# EAGLE board UDAWA Gadadar (EAGLE 9.7.0)
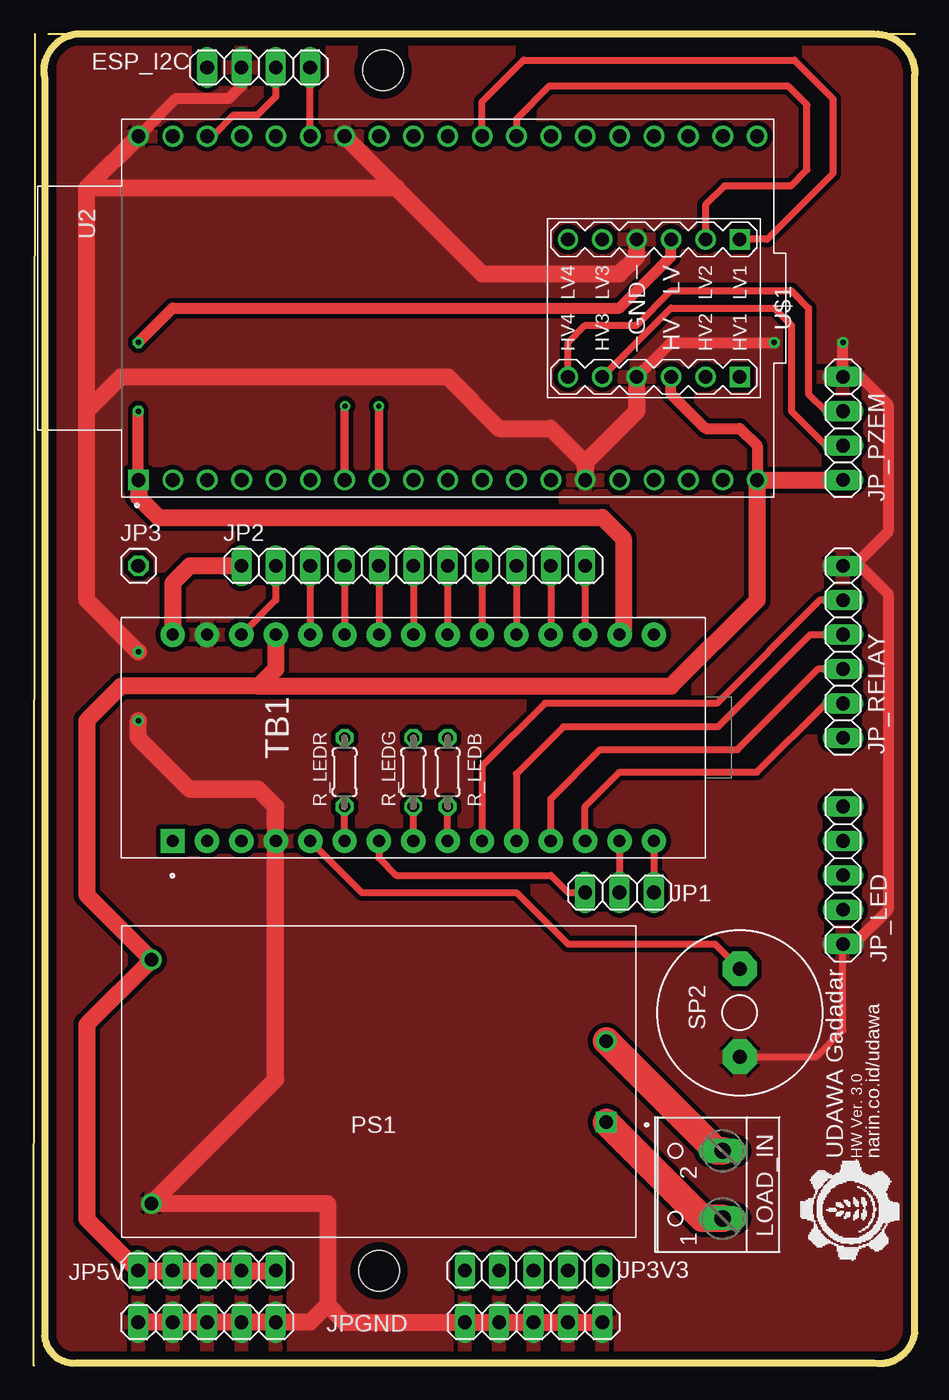
[diagram p0: board, top side]
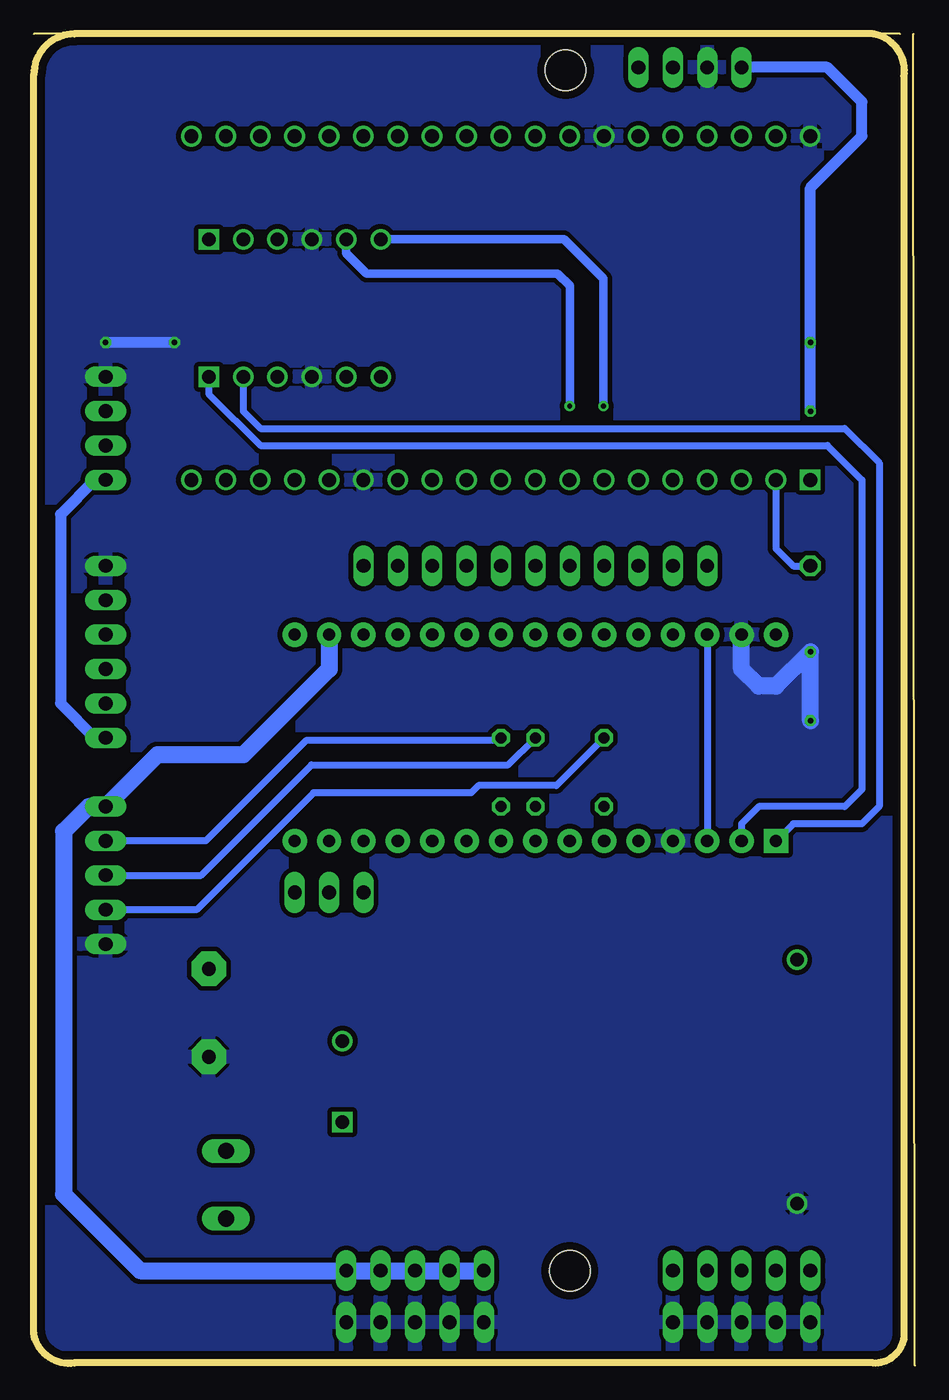
[diagram p1: board, bottom side, seen from below]

Size 64.34 x 98.23 mm. Coordinates in mm from the lower left corner, seen from the top.
Outline: 0.04,95.03 0.04,2.03 arc90 2.34,0.03 61.34,0.03 arc90 64.34,2.23 64.34,95.23 arc90 61.34,98.23 2.34,98.23 arc90 0.04,95.03
Copper layers (1*16): Top 0.035mm / dielectric 1.5mm / Bottom 0.035mm
Design rules "default *": minimum track width 6mil, minimum drill 0.35mm, track to track 0.35mm, track to pad 0.35mm, pad to pad 0.35mm, via to via 0.35mm, smd to smd 0.15mm, copper to edge 0.6mm, drill to drill 0.3mm, minimum pad ring 10mil, minimum via ring 8mil, stop-mask expansion 4mil, vias tented up to drill 0mil, thermal gap 10mil
Holes 3 mm at 24.74,6.85 25.04,95.53

## Footprints (pad centres in the part's own frame; a part is rotated, then mirrored left to right if it is on the bottom)
1X04 = drill 1.016 long: 1 -3.81,0; 2 -1.27,0; 3 1.27,0; 4 3.81,0
1X03 = drill 1.016 long: 1 -2.54,0; 2 0,0; 3 2.54,0
1X11 = drill 1.016 long: 1 -12.7,0; 2 -10.16,0; 3 -7.62,0; 4 -5.08,0; 5 -2.54,0; 6 0,0; 7 2.54,0; 8 5.08,0; 9 7.62,0; 10 10.16,0; 11 12.7,0
1X01 = drill 1.016 octagon: 1 0,0
1X05 = drill 1.016 long: 1 -5.08,0; 2 -2.54,0; 3 0,0; 4 2.54,0; 5 5.08,0
1X06 = drill 1.016 long: 1 -6.35,0; 2 -3.81,0; 3 -1.27,0; 4 1.27,0; 5 3.81,0; 6 6.35,0
W237-102 = drill 1.194 long: 1 -2.5,-1.27; 2 2.5,-1.27
CONV_HLK-5M05 = drill 1 pad 1.5 square: 1 -16.8,3 | drill 1 pad 1.5: 2 -16.8,-3; 3 16.8,9; 4 16.8,-9
0204/5 = drill 0.813 octagon: 1 -2.54,0; 2 2.54,0
AL60P = drill 1.016 pad 2.54 octagon: 1 -3.251,0; 2 3.251,0
SHIELD_ARDUINO_NANO = drill 0.9 pad 1.8 square: 1 -7.62,17.78 | drill 0.9 pad 1.8: 2 -7.62,15.24; 3 -7.62,12.7; 4 -7.62,10.16; 5 -7.62,7.62; 6 -7.62,5.08; 7 -7.62,2.54; 8 -7.62,0; 9 -7.62,-2.54; 10 -7.62,-5.08; 11 -7.62,-7.62; 12 -7.62,-10.16; 13 -7.62,-12.7; 14 -7.62,-15.24; 15 -7.62,-17.78; 16 7.62,-17.78; 17 7.62,-15.24; 18 7.62,-12.7; 19 7.62,-10.16; 20 7.62,-7.62; 21 7.62,-5.08; 22 7.62,-2.54; 23 7.62,0; 24 7.62,2.54; 25 7.62,5.08; 26 7.62,7.62; 27 7.62,10.16; 28 7.62,12.7; 29 7.62,15.24; 30 7.62,17.78
MODULE_ESP32-DEVKITC-32U = drill 1.02 square: 1 -12.7,22.85 | drill 1.02: 2 -12.7,20.31; 3 -12.7,17.77; 4 -12.7,15.23; 5 -12.7,12.69; 6 -12.7,10.15; 7 -12.7,7.61; 8 -12.7,5.07; 9 -12.7,2.53; 10 -12.7,-0.01; 11 -12.7,-2.55; 12 -12.7,-5.09; 13 -12.7,-7.63; 14 -12.7,-10.17; 15 -12.7,-12.71; 16 -12.7,-15.25; 17 -12.7,-17.79; 18 -12.7,-20.33; 19 -12.7,-22.87; 20 12.7,-22.87; 21 12.7,-20.33; 22 12.7,-17.79; 23 12.7,-15.25; 24 12.7,-12.71; 25 12.7,-10.17; 26 12.7,-7.63; 27 12.7,-5.09; 28 12.7,-2.55; 29 12.7,-0.01; 30 12.7,2.53; 31 12.7,5.07; 32 12.7,7.61; 33 12.7,10.15; 34 12.7,12.69; 35 12.7,15.23; 36 12.7,17.77; 37 12.7,20.31; 38 12.7,22.85
LEVEL-SHIFTER-4CH = drill 1 square: J1.1 -5.08,6.35; J2.1 5.08,6.35 | drill 1: J1.2 -5.08,3.81; J1.3 -5.08,1.27; J1.4 -5.08,-1.27; J1.5 -5.08,-3.81; J1.6 -5.08,-6.35; J2.2 5.08,3.81; J2.3 5.08,1.27; J2.4 5.08,-1.27; J2.5 5.08,-3.81; J2.6 5.08,-6.35

## Placement (x,y rotation side)
ESP_I2C  [1X04]  15.85,95.75 0 top
JP1  [1X03]  42.52,34.79 0 top
JP2  [1X11]  27.28,58.92 0 top
JP3  PINHD-1X1  [1X01]  6.96,58.92 0 top
JP3V3  [1X05]  36.17,6.85 180 top
JP5V  [1X05]  12.04,6.85 0 top
JP_LED  [1X05]  59.03,36.06 90 top
JP_PZEM  [1X04]  59.03,69.08 270 top
JP_RELAY  [1X06]  59.03,52.57 270 top
JPGND  [1X05]  36.17,3.04 0 top
JPGND1  [1X05]  12.04,3.04 0 top
LOAD_IN  [W237-102]  48.87,13.2 90 top
PS1  HLK-5M05  [CONV_HLK-5M05]  24.74,20.82 180 top
R_LEDB  1K  [0204/5]  29.82,43.68 90 top
R_LEDG  1K  [0204/5]  27.28,43.68 90 top
R_LEDR  1K  [0204/5]  22.2,43.68 90 top
SP2  AL60P  [AL60P]  51.41,25.9 90 top
TB1  ARDUINO_NANO  [SHIELD_ARDUINO_NANO]  27.28,46.22 90 top
U2  ESP32-DEVKITC-32U  [MODULE_ESP32-DEVKITC-32U]  29.82,77.97 90 top
U$1  LEVEL-SHIFTER-4CH  [LEVEL-SHIFTER-4CH]  45.06,77.97 270 top

## Library data of the parts
ESP_I2C JP1 JP2 JP3V3 JP5V JP_LED JP_PZEM JP_RELAY JPGND JPGND1 = pinhead
JP3 = Connector; CATEGORY: CONNECTOR; SUB-CATEGORY: PIN-HEADER
LOAD_IN = con-wago-500; MPN: 237-102; OC_FARNELL: unknown; OC_NEWARK: 70K9898
PS1 = HLK-5M05; AVAILABILITY: Not in stock; MF: Hi-link; MP: HLK-5M05; PACKAGE: Package; PRICE: None
R_LEDB R_LEDG R_LEDR = rcl; SPICEPREFIX: R
SP2 = buzzer; OC_FARNELL: unknown; OC_NEWARK: unknown
TB1 = ARDUINO_NANO; AVAILABILITY: Not in stock; DESCRIPTION: Small, complete, and breadboard-friendly board based on the ATmega328 (Arduino Nano 3.x); MF: Arduino; MP: Arduino Nano; PACKAGE: Non-Standard Arduino; PRICE: None
U2 = ESP32-DEVKITC-32U; AVAILABILITY: In Stock; DESCRIPTION: ESP32-WROOM-32UE series Transceiver; 802.11 b/g/n (Wi-Fi, WiFi, WLAN), Bluetooth® Smart Ready 4.x Dual Mode Evaluation Board; MF: Espressif Systems; MP: ESP32-DEVKITC-32U; PACKAGE: None; PRICE: None; PURCHASE-URL: https://pricing.snapeda.com/search/part/ESP32-DEVKITC-32U/?ref=eda
U$1 = diy-modules

## Nets
3V3: ESP_I2C.1 JP3V3.1 JP3V3.2 JP3V3.3 JP3V3.4 JP3V3.5 JP_LED.5 TB1.17 U2.1 U$1.J1.3
5V: JP5V.1 JP5V.2 JP5V.3 JP5V.4 JP5V.5 JP_PZEM.4 JP_RELAY.6 PS1.4 TB1.27 U2.19 U$1.J2.3
AC1: LOAD_IN.1 PS1.1
AC2: LOAD_IN.2 PS1.2
CA0: JP2.10 TB1.19
CA1: JP2.9 TB1.20
CA2: JP2.8 TB1.21
CA3: JP2.7 TB1.22
CA6: JP2.4 TB1.25
CA7: JP2.3 TB1.26
CAREF: JP2.11 TB1.18
CD4: JP1.1 TB1.7
CD11: JP1.2 TB1.14
CD12: JP1.3 TB1.15
CD13: TB1.16
CH1: JP_RELAY.2 TB1.10
CH2: JP_RELAY.3 TB1.11
CH3: JP_RELAY.4 TB1.12
CH4: JP_RELAY.5 TB1.13
COMCU_RX: TB1.2 U$1.J2.1
COMCU_SCL: JP2.5 TB1.24
COMCU_SDA: JP2.6 TB1.23
COMCU_TX: TB1.1 U$1.J2.2
CRST: JP2.2 TB1.3 TB1.28
CVIN: JP2.1 TB1.30
ESP_SCL: ESP_I2C.3 U2.36
ESP_SDA: ESP_I2C.4 U2.33
GND: ESP_I2C.2 JP_LED.1 JP_PZEM.1 JP_RELAY.1 JPGND1.1 JPGND1.2 JPGND1.3 JPGND1.4 JPGND1.5 JPGND.1 JPGND.2 JPGND.3 JPGND.4 JPGND.5 PS1.3 SP2.1 TB1.4 TB1.29 U2.14 U2.32 U2.38 U$1.J1.4 U$1.J2.4
MEN: JP3.1 U2.2
PIN_BUZZER: SP2.2 TB1.5
PIN_LEDB: R_LEDB.1 TB1.9
PIN_LEDG: R_LEDG.1 TB1.8
PIN_LEDR: R_LEDR.1 TB1.6
PZEM_RX: JP_PZEM.3 U$1.J2.5
PZEM_TX: JP_PZEM.2 U$1.J2.6
RLEDB: JP_LED.4 R_LEDB.2
RLEDG: JP_LED.3 R_LEDG.2
RLEDR: JP_LED.2 R_LEDR.2
S0_RX: U2.34
S0_TX: U2.35
S1_RX: U2.7 U$1.J1.6
S1_TX: U2.8 U$1.J1.5
S2_RX: U2.27 U$1.J1.2
S2_TX: U2.28 U$1.J1.1

## Tracks (layer width: path | path; a pad name or v marks a point on that pad's centre or on a via)
3V3  (via drill 0.41)
  Top 0.813: v6.96,75.43 9.5,77.97 42.52,77.97 46.33,81.78 U$1.J1.3 | U2.1 v6.96,70.35
  Top 1.27: U2.1 6.97,64.01 6.96,64 8.46,62.5 41.25,62.5 42.79,60.95 42.79,54.12 TB1.17
  Bottom 0.813: v6.96,70.35 v6.96,75.43 6.96,86.86 3.15,90.67 3.15,93.21 5.69,95.75 ESP_I2C.1
  Bottom 1.27: TB1.17 42.52,51.3 48.87,44.95 55.22,44.95 JP_LED.5 60.3,41.14 62.13,39.3 62.13,12.5 56.49,6.85 JP3V3.1 JP3V3.2 JP3V3.3 JP3V3.4 JP3V3.5
5V
  Top 0.813: U$1.J2.3 46.33,71.62 48.87,69.08 51.41,69.08 52.69,67.8 U2.19
  Top 1.27: TB1.27 17.12,51.3 15.85,50.03 | 15.85,50.03 5.69,50.03 3.15,47.49 3.15,34.61 PS1.4 3.15,25.03 3.15,10.66 JP5V.1 JP5V.2 JP5V.3 JP5V.4 JP5V.5 | 15.85,50.03 46.33,50.03 52.69,56.39 U2.19 JP_PZEM.4
  Bottom 0.813: JP_PZEM.4 59.82,65.27 62.36,62.73 62.36,48.76 59.82,46.22 JP_RELAY.6
AC1
  Top 2.032: PS1.1 48.66,10.7 LOAD_IN.1
AC2
  Top 2.032: PS1.2 49.66,15.7 LOAD_IN.2
CA0
  Top 0.508: JP2.10 TB1.19
CA1
  Top 0.508: JP2.9 TB1.20
CA2
  Top 0.508: JP2.8 TB1.21
CA3
  Top 0.508: JP2.7 TB1.22
CA6
  Top 0.508: JP2.4 TB1.25
CA7
  Top 0.508: JP2.3 TB1.26
CAREF
  Top 0.508: JP2.11 TB1.18
CD4
  Top 0.508: TB1.7 24.74,37.33 26.01,36.06 37.44,36.06 38.71,34.79 JP1.1
CD11
  Top 0.508: TB1.14 JP1.2
CD12
  Top 0.508: TB1.15 JP1.3
CH1
  Top 0.508: TB1.10 32.36,44.12 36.99,48.76 49.69,48.76 57.31,56.38 JP_RELAY.2
CH2
  Top 0.508: TB1.11 34.9,43.55 38.37,47.03 49.8,47.03 56.61,53.84 JP_RELAY.3
CH3
  Top 0.508: TB1.12 37.44,41.71 41.08,45.35 51.24,45.35 57.18,51.3 JP_RELAY.4
CH4
  Top 0.508: JP_RELAY.5 57.76,48.76 52.68,43.68 42.52,43.68 39.98,41.14 TB1.13
COMCU_RX
  Bottom 0.508: U$1.J2.1 51.41,71.62 47.6,67.81 5.69,67.81 3.15,65.27 3.15,42.41 4.42,41.14 10.77,41.14 12.04,39.87 TB1.2
COMCU_SCL
  Top 0.508: JP2.5 TB1.24
COMCU_SDA
  Top 0.508: JP2.6 TB1.23
COMCU_TX
  Bottom 0.508: U$1.J2.2 48.87,70.35 47.6,69.08 4.42,69.08 1.88,66.54 1.88,41.14 3.15,39.87 8.23,39.87 TB1.1
CRST
  Top 0.508: JP2.2 17.12,56.38 TB1.28
  Bottom 0.508: TB1.28 TB1.3
CVIN
  Top 1.27: JP2.1 10.77,58.92 9.5,57.65 TB1.30
ESP_SCL
  Top 0.508: U2.36 12.44,90.67 13.98,92.21 15.75,92.21 17.12,93.58 ESP_I2C.3
ESP_SDA
  Top 0.254: U2.33
  Top 0.508: U2.33 ESP_I2C.4
GND  (via drill 0.41)
  Top 0.508: SP2.1 57.04,22.65 59.03,24.63 JP_LED.1
  Top 0.813: U$1.J2.4 46.33,75.43 v53.95,75.43 | v59.03,75.43 JP_PZEM.1 60.3,72.89 62.36,70.82 62.36,61.46 59.82,58.92 JP_RELAY.1 60.3,58.92 62.36,56.85 62.36,33.52 59.82,30.98 JP_LED.1 | U2.38 9.76,93.47 13.66,93.47 14.55,94.36 14.55,95.73 ESP_I2C.2
  Top 1.27: v6.96,47.49 6.96,46.22 10.77,42.41 15.85,42.41 17.12,41.14 TB1.4 17.12,21 PS1.3 20.93,11.82 20.93,4.31 | 3.15,70.35 3.15,56.38 v6.96,52.57 | 3.15,70.35 5.69,72.89 29.82,72.89 33.63,69.08 37.44,69.08 39.99,66.53 U2.14 39.99,66.55 43.79,70.35 U$1.J2.4 | U$1.J1.4 43.79,81.78 42.52,80.51 32.37,80.51 26.01,86.86 | 26.01,86.86 U2.32 | 3.15,70.35 3.15,86.85 3.16,86.86 | U2.38 3.16,86.86 | 3.16,86.86 26.01,86.86 | JPGND1.1 JPGND1.2 JPGND1.3 JPGND1.4 JPGND1.5 19.66,3.04 20.93,4.31 | JPGND.5 JPGND.4 JPGND.3 JPGND.2 JPGND.1 22.2,3.04 20.93,4.31
  Bottom 0.813: v53.95,75.43 v59.03,75.43
  Bottom 1.27: v6.96,47.49 v6.96,52.57 9.5,50.03 10.77,50.03 12.04,51.3 TB1.29
  pour Top: 0.61,0.2 64.11,0.2 64.11,97.96 0.61,97.96
  pour Bottom: 0.61,0.5 64.11,0.5 64.11,97.96 0.61,97.96
MEN
  Bottom 0.254: U2.2
  Bottom 0.508: U2.2 9.5,60.19 8.23,58.92 JP3.1
PIN_BUZZER
  Top 0.508: TB1.5 23.47,34.79 34.9,34.79 38.71,30.98 49.58,30.98 SP2.2
PIN_LEDB
  Top 0.508: TB1.9 R_LEDB.1
PIN_LEDG
  Top 0.508: TB1.8 R_LEDG.1
PIN_LEDR
  Top 0.508: TB1.6 R_LEDR.1
PZEM_RX
  Top 0.508: U$1.J2.5 46.33,77.97 53.95,77.97 55.22,76.7 55.22,70.35 57.76,67.81 JP_PZEM.3
PZEM_TX
  Top 0.508: U$1.J2.6 38.71,75.43 39.98,76.7 43.79,76.7 46.33,79.24 55.22,79.24 56.49,77.97 56.49,71.62 57.76,70.35 JP_PZEM.2
RLEDB
  Bottom 0.508: JP_LED.4 51.64,38.6 44.23,46.01 30.02,46.01 R_LEDB.2
RLEDG
  Bottom 0.508: R_LEDG.2 29.28,44.21 43.83,44.21 51.98,36.06 JP_LED.3
RLEDR
  Bottom 0.508: R_LEDR.2 25.73,42.68 31.49,42.68 32.02,42.16 43.68,42.16 52.32,33.52 JP_LED.2
S1_RX  (via drill 0.35)
  Top 0.61: U2.7 22.21,70.7 v22.24,70.73
  Bottom 0.61: v22.24,70.73 22.24,80.13 25.16,83.05 U$1.J1.6
S1_TX  (via drill 0.35)
  Top 0.61: U2.8 v24.75,70.72 v24.74,70.73
  Bottom 0.61: v24.74,70.73 24.74,79.63 25.64,80.53 39.74,80.53 41.25,82.04 U$1.J1.5
S2_RX
  Top 0.508: U$1.J1.2 48.87,85.59 50.26,86.99 55.16,86.99 56.36,88.18 56.36,92.98 54.98,94.35 37.32,94.35 34.91,91.94 U2.27
S2_TX
  Top 0.508: U2.28 32.37,93.22 35.43,96.28 55.44,96.28 58.29,93.43 58.29,87.91 53.43,83.05 U$1.J1.1
(copper drawn outside any net)
  shapes: Bottom area x1, Top area x1

## Text on the board
tPlace: UDAWA Gadadar | HW Ver. 3.0 | narin.co.id/udawa